# Altium PCB ATMega64_Breakout.PcbDoc
Units mil, origin at the board's own origin, x right, y up, seen from the top; angles counter-clockwise.
Board outline 2210 x 2080 mil, 2 copper layers (Top Layer, Bottom Layer); 18 components, 62 nets, 197 pads, 0 vias.
Unrouted connection lines stored in the file: 42.
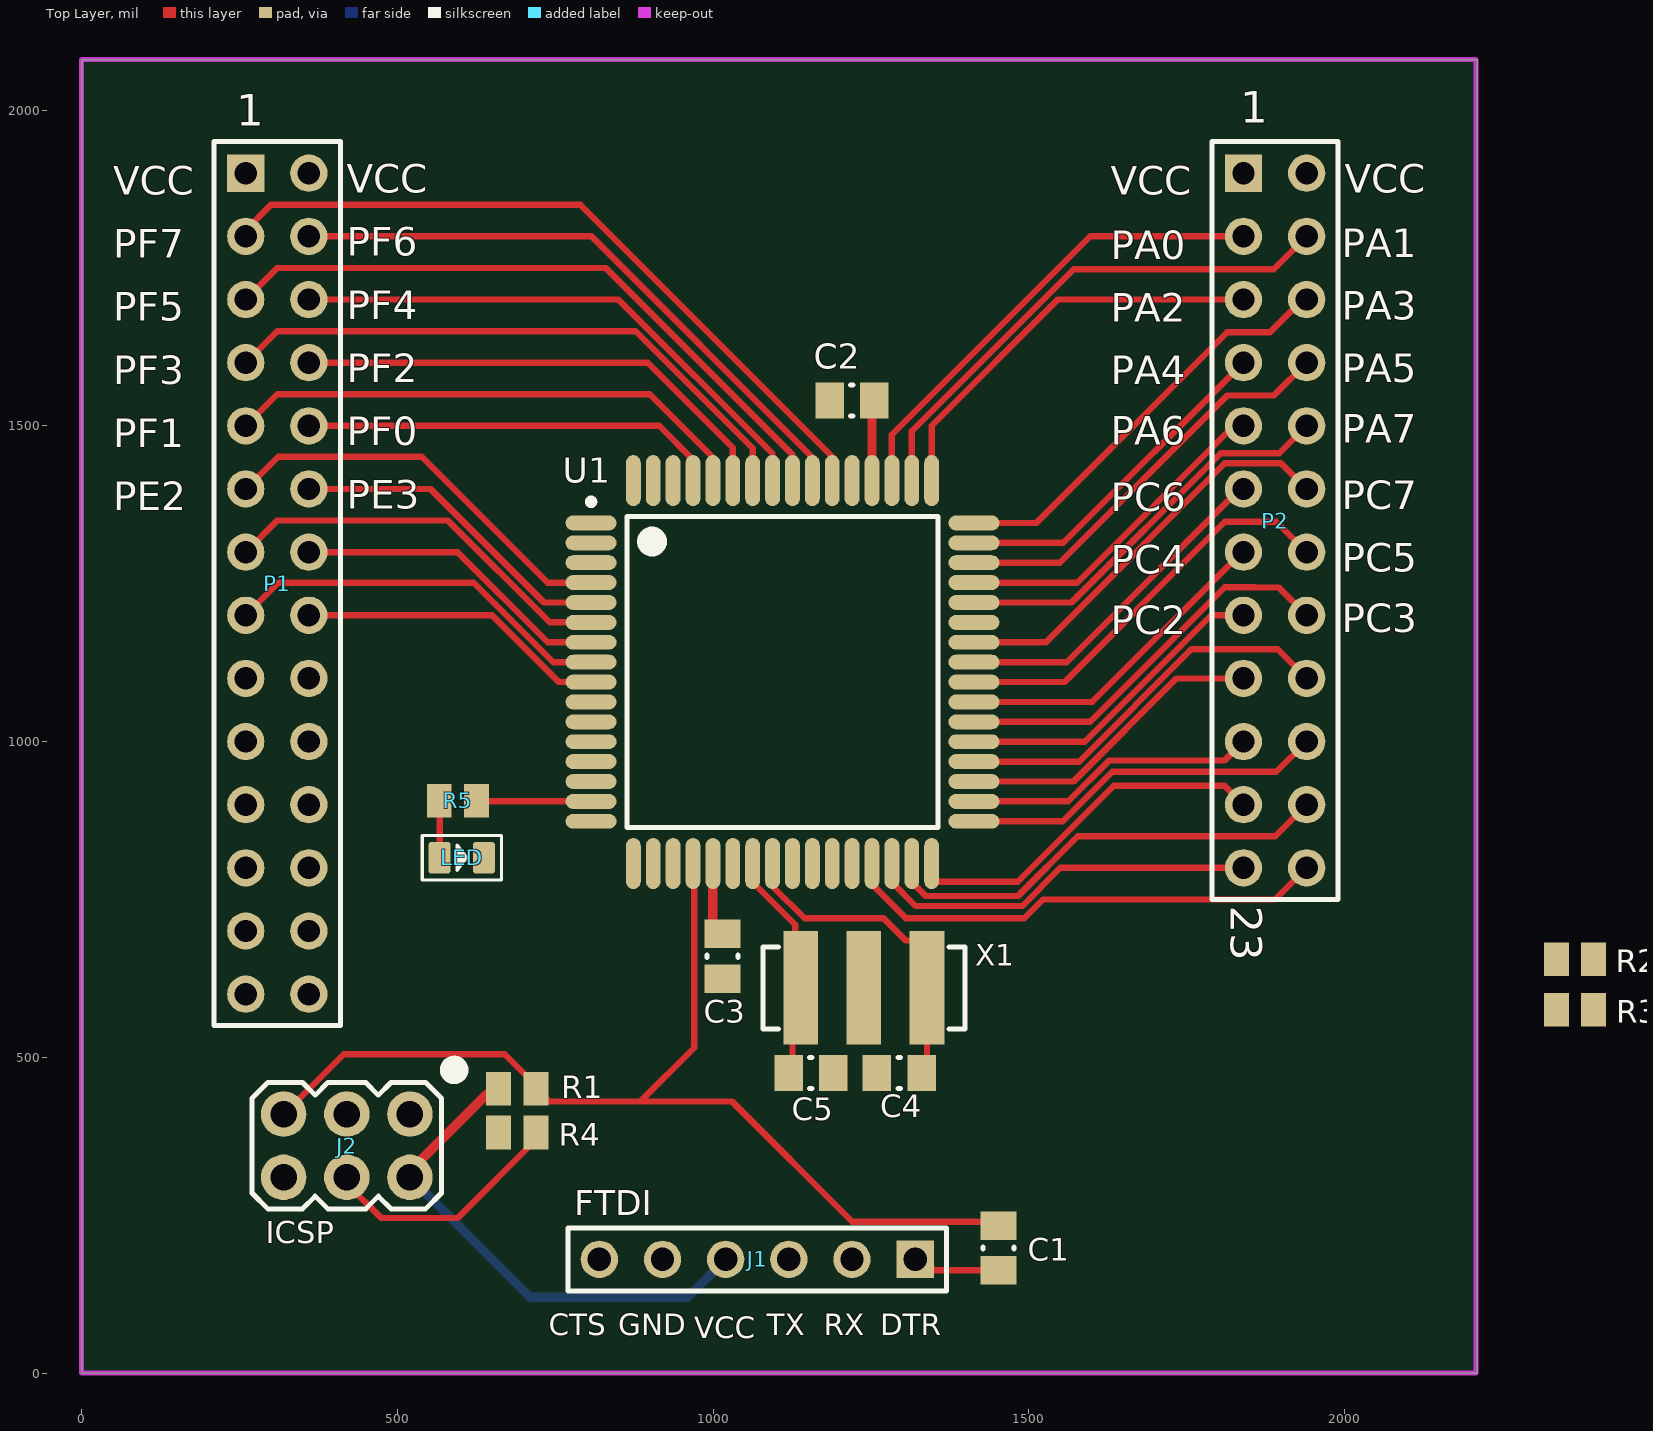
[diagram p0: Top Layer view]
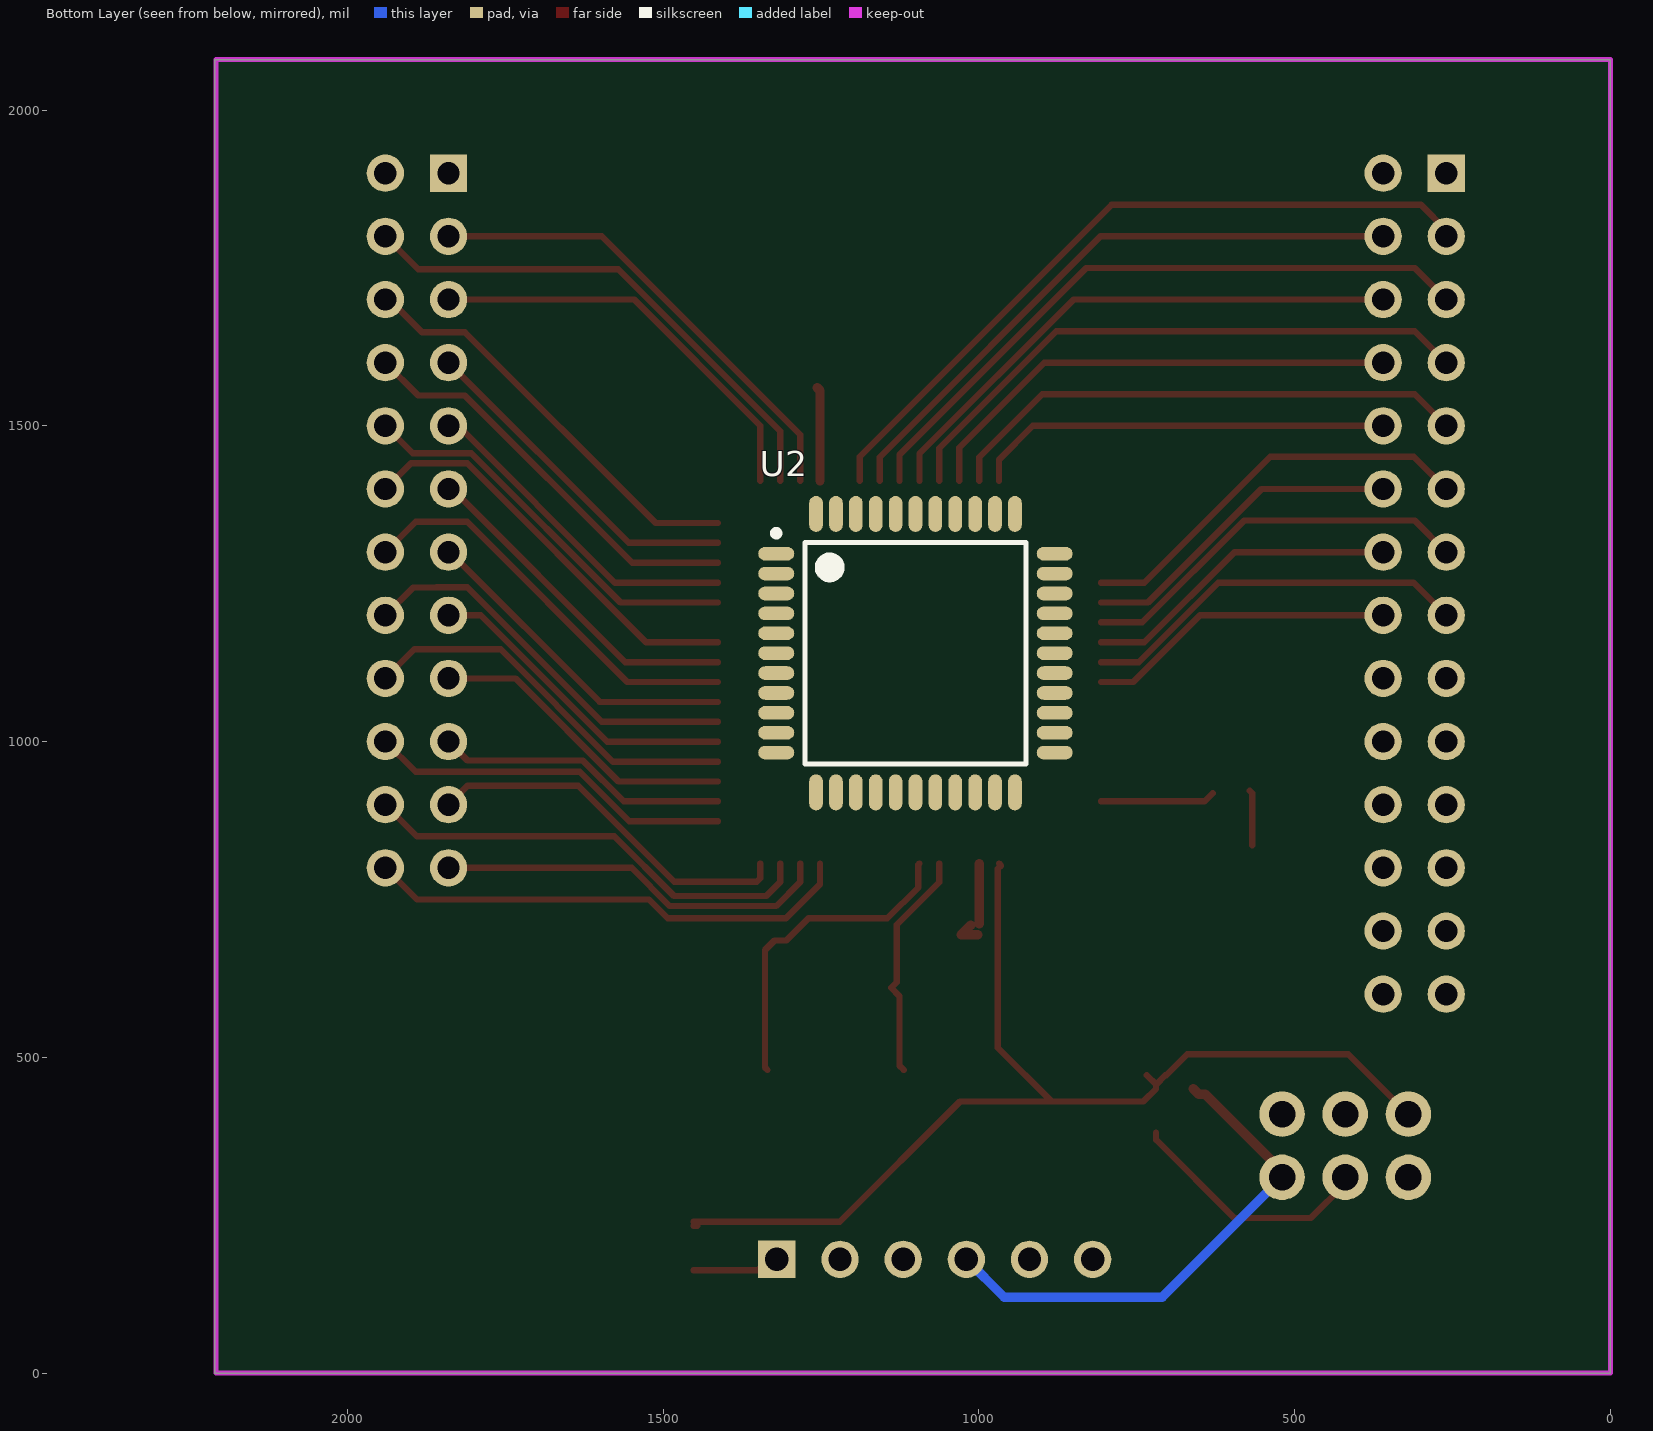
[diagram p1: Bottom Layer view, seen from below]

## Layer stack, top to bottom
Top Solder: solder mask 0.4, Solder Resist, Dk 3.5
Top Layer: signal copper 1.4
Dielectric 1: dielectric 12.6, FR-4, Dk 4.8
Bottom Layer: signal copper 1.4
Bottom Solder: solder mask 0.4, Solder Resist, Dk 3.5

## Board outline
0,0 2210,0 2210,2080 0,2080

## Design rules (kind name [scope] priority, off if disabled: settings)
Clearance [All] p1: gap=6 ignorepadtopadclearanceinfootprint=FALSE
PolygonConnect [All] p1: connectstyle=Relief reliefconductorwidth=10 reliefentries=4 polygonreliefangle="90 Angle" airgapwidth=10
RoutingVias [All] p1: holewidth=28 width=50 viastyle="Through Hole" minholewidth=28 minwidth=50 maxholewidth=28 maxwidth=50
SolderMaskExpansion [All] p1: expansion=4
Width [All] p1: maxlimit=300 minlimit=7 preferedwidth=10
30 further rules are at their usual default settings.

## Components (designator, comment, footprint, x,y, rotation, side; value= is the part's Value field where it differs from the comment)
C1 "100n" CAPC0805(2012)75_N 1452,198 r90 top
C2 "100n" CAPC0805(2012)75_N 1220,1540 r0 top
C3 "100n" CAPC0805(2012)75_N 1015,660 r90 top
C4 "22pF" CAPC0805(2012)75_N 1295,475 r0 top
C5 "22pF" CAPC0805(2012)75_N 1155,475 r180 top
J1 "FTDI" HDR1X6 1320,180 r180 top
J2 "ICSP" ICSP 520,410 r0 top locked
LED "LED" LED-0805 602,816 r0 top (schematic designator LED1)
P1 "Header 14X2" HDR2X14 260,1900 r270 top
P2 "Header 12X2" HDR2X12 1840,1900 r270 top
R1 "10k" RCHIP0805 690,450 r0 top
R2 "10k" RCHIP0805 2365,655 r180 top
R3 "10k" RCHIP0805 2365,575 r180 top
R4 "1K" RCHIP0805 690,380.87 r0 top
R5 "330" RCHIP0805 596,906 r0 top
U1 "ATmega64L-8AU" 64A_M 1110,1110 r0 top
U2 "ATmega1284P-AU" 44A_L 1100.5,1140 r180 bottom
X1 "XTAL" CRES_SMT 1338.77,610 r270 top

## Footprints (in the part's own frame and the unit in brackets; to place one, negate y for a bottom-side part, rotate by r counter-clockwise, add the part's x,y. Pads: shape width x height; smd on the part's side, far side on the other; paste and mask are expansions set on the pad)
44A_L [mm] "Thin QFP, 44-Leads, Body 10x10mm, Pitch 0.8mm, IPC High Density"
  oval 1.45x0.55 smd: 1(-5.6,4) 2(-5.6,3.2) 3(-5.6,2.4) 4(-5.6,1.6) 5(-5.6,0.8) 6(-5.6,0) 7(-5.6,-0.8) 8(-5.6,-1.6) 9(-5.6,-2.4) 10(-5.6,-3.2) 11(-5.6,-4) 23(5.6,-4) 24(5.6,-3.2) 25(5.6,-2.4) 26(5.6,-1.6) 27(5.6,-0.8) 28(5.6,0) 29(5.6,0.8) 30(5.6,1.6) 31(5.6,2.4) 32(5.6,3.2) 33(5.6,4)
  oval 0.55x1.45 smd: 12(-4,-5.6) 13(-3.2,-5.6) 14(-2.4,-5.6) 15(-1.6,-5.6) 16(-0.8,-5.6) 17(0,-5.6) 18(0.8,-5.6) 19(1.6,-5.6) 20(2.4,-5.6) 21(3.2,-5.6) 22(4,-5.6) 34(4,5.6) 35(3.2,5.6) 36(2.4,5.6) 37(1.6,5.6) 38(0.8,5.6) 39(0,5.6) 40(-0.8,5.6) 41(-1.6,5.6) 42(-2.4,5.6) 43(-3.2,5.6) 44(-4,5.6)
  silkscreen extent -5.72,-4.45 4.45,4.95, body extent -5,-5 5,5, height 1.2
64A_M [mm] "Thin QFP, 64-Leads, Body 14x14mm, Pitch 0.8mm, IPC Low Density"
  oval 2.05x0.6 smd: 1(-7.7,6) 2(-7.7,5.2) 3(-7.7,4.4) 4(-7.7,3.6) 5(-7.7,2.8) 6(-7.7,2) 7(-7.7,1.2) 8(-7.7,0.4) 9(-7.7,-0.4) 10(-7.7,-1.2) 11(-7.7,-2) 12(-7.7,-2.8) 13(-7.7,-3.6) 14(-7.7,-4.4) 15(-7.7,-5.2) 16(-7.7,-6) 33(7.7,-6) 34(7.7,-5.2) 35(7.7,-4.4) 36(7.7,-3.6) 37(7.7,-2.8) 38(7.7,-2) 39(7.7,-1.2) 40(7.7,-0.4) 41(7.7,0.4) 42(7.7,1.2) 43(7.7,2) 44(7.7,2.8) 45(7.7,3.6) 46(7.7,4.4) 47(7.7,5.2) 48(7.7,6)
  oval 0.6x2.05 smd: 17(-6,-7.7) 18(-5.2,-7.7) 19(-4.4,-7.7) 20(-3.6,-7.7) 21(-2.8,-7.7) 22(-2,-7.7) 23(-1.2,-7.7) 24(-0.4,-7.7) 25(0.4,-7.7) 26(1.2,-7.7) 27(2,-7.7) 28(2.8,-7.7) 29(3.6,-7.7) 30(4.4,-7.7) 31(5.2,-7.7) 32(6,-7.7) 49(6,7.7) 50(5.2,7.7) 51(4.4,7.7) 52(3.6,7.7) 53(2.8,7.7) 54(2,7.7) 55(1.2,7.7) 56(0.4,7.7) 57(-0.4,7.7) 58(-1.2,7.7) 59(-2,7.7) 60(-2.8,7.7) 61(-3.6,7.7) 62(-4.4,7.7) 63(-5.2,7.7) 64(-6,7.7)
  silkscreen extent -7.82,-6.25 6.25,6.97, body extent -7,-7 7,7, height 1.2
CAPC0805(2012)75_N [mm] "Chip Capacitor, Body 2.0x1.2mm, Height 0.75mm, IPC Medium Density"
  rect 1.15x1.45 smd: 1(-0.9,0) 2(0.9,0)
  silkscreen extent -0.05,-0.62 0.05,0.63, body extent -1.51,-0.72 1.49,0.73, height 0.75
CRES_SMT [mil]
  rect 180x55 smd: 1(0,0) 2(0,-100) 3(0,-200)
  silkscreen extent -65,-260 65,60
HDR1X6 [mm] "Connector; Header; 6 Position"
  rect 1.5x1.5 hole 0.94: 1(0,0)
  round 1.5 hole 0.94: 2(2.54,0) 3(5.08,0) 4(7.62,0) 5(10.16,0) 6(12.7,0)
  silkscreen extent -1.27,-1.27 13.97,1.27
HDR2X12 [mm] "Connector; Header; 12x2 Position"
  rect 1.5x1.5 hole 0.9: 1(0,0)
  round 1.5 hole 0.9: 2(0,2.54) 3(2.54,0) 4(2.54,2.54) 5(5.08,0) 6(5.08,2.54) 7(7.62,0) 8(7.62,2.54) 9(10.16,0) 10(10.16,2.54) 11(12.7,0) 12(12.7,2.54) 13(15.24,0) 14(15.24,2.54) 15(17.78,0) 16(17.78,2.54) 17(20.32,0) 18(20.32,2.54) 19(22.86,0) 20(22.86,2.54) 21(25.4,0) 22(25.4,2.54) 23(27.94,0) 24(27.94,2.54)
  silkscreen extent -1.27,-1.27 29.21,3.81
HDR2X14 [mm] "Connector; Header; 14x2 Position"
  rect 1.5x1.5 hole 0.9: 1(0,0)
  round 1.5 hole 0.9: 2(0,2.54) 3(2.54,0) 4(2.54,2.54) 5(5.08,0) 6(5.08,2.54) 7(7.62,0) 8(7.62,2.54) 9(10.16,0) 10(10.16,2.54) 11(12.7,0) 12(12.7,2.54) 13(15.24,0) 14(15.24,2.54) 15(17.78,0) 16(17.78,2.54) 17(20.32,0) 18(20.32,2.54) 19(22.86,0) 20(22.86,2.54) 21(25.4,0) 22(25.4,2.54) 23(27.94,0) 24(27.94,2.54) 25(30.48,0) 26(30.48,2.54) 27(33.02,0) 28(33.02,2.54)
  silkscreen extent -1.27,-1.27 34.29,3.81
ICSP [mil]
  round 72 hole 42: 1(0,0) 2(0,-100) 3(-100,0) 4(-100,-100) 5(-200,0) 6(-200,-100)
  silkscreen extent -250,-150 80,80
LED-0805 [mil]
  rrect25% 35x50 smd: +(-35,0) -(35,0)
  silkscreen extent -62,-35 63,35
RCHIP0805 [mm] "Chip Resistor, 2-Leads, Body 2.00x1.25mm, IPC High Density"
  rect 1x1.35 smd: 1(-0.75,0) 2(0.75,0)
  body extent -1.1,-0.72 1.1,0.72, height 0.6

## Part data
C1 C2 C3 C4 C5: library part U0805F104ZCT, TOLERANCE=-20/+80%, VOLTAGERATING=50V, MPN=U0805F104ZCT, OC_FARNELL=9406409, OC_NEWARK=38K9281, SUPPLIER=Multicomp
J1: library part ICSP, "In-Circuit Serial Programming Header"
J2: "AVR ICSP"
LED: library part SMD-LED-CLEAR-RED(0805), MPN=17-215SURC/S530-A2/TR8
P1: "Header, 14-Pin, Dual row", LatestRevisionDate=17-Jul-2002, LatestRevisionNote="Re-released for DXP Platform.", Publisher="Altium Limited"
P2: "Header, 12-Pin, Dual row", LatestRevisionDate=17-Jul-2002, LatestRevisionNote="Re-released for DXP Platform.", Publisher="Altium Limited"
R1 R2 R3: library part MC0.1W08051%10K, TOLERANCE=±1%, MPN=MC0.1W08051%10K, OC_FARNELL=9332391, OC_NEWARK=-, SUPPLIER=Multicomp, WATTAGE="1/10 W"
R4 R5: library part MC0.1W08051%1K, TOLERANCE=±1%, MPN=MC0.1W08051%1K, OC_FARNELL=9332383, OC_NEWARK=-, SUPPLIER=Multicomp, WATTAGE="1/10 W"
U1: "8-bit AVR Microcontroller, 2.7-5.5V, 64KB Flash, 2KB EEPROM, 4KB SRAM, 64-pin TQFP, Industrial Grade (-40°C to 85°C), Pb-Free", Code_JEDEC=MS-026-AEB, ComponentLink1Description="Manufacturer URL", ComponentLink1URL=http://www.atmel.com/, ComponentLink2Description="ATmega64(L)  Datasheet", ComponentLink2URL=http://www.atmel.com/dyn/resources/prod_documents/doc2490.pdf, ComponentLink3Description="ATmega64(L) Summary", ComponentLink3URL=http://www.atmel.com/dyn/resources/prod_documents/2490S.pdf, DatasheetVersion="revQ, Jul-2010", PackageDescription="64-Pin Plastic Thin Profile Quad Flat Pack, 14 x 14 x 1.0 mm Body, 0.8 mm Pitch (TQFP)", PackageReference=64A, PackageVersion="revC, Oct-2010"
U2: "8-bit AVR Microcontroller, 128KB Flash, 4KB EEPROM, 16KB SRAM, 44-pin TQFP, Industrial Grade (-40°C to 85°C)", Code_JEDEC=MS-026-ACB, ComponentLink1Description="Manufacturer URL", ComponentLink1URL=http://www.atmel.com/, ComponentLink2Description="ATmega164A/164PA/324A/324PA/644A/644PA/1284/1284P Datasheet", ComponentLink2URL=http://www.atmel.com/dyn/resources/prod_documents/doc8272.pdf, ComponentLink3Description="ATmega164A/164PA/324A/324PA/644A/644PA/1284/1284P Summary", ComponentLink3URL=http://www.atmel.com/dyn/resources/prod_documents/8272S.pdf, DatasheetVersion="revC, Jun-2011", PackageDescription="44-Pin Plastic Thin Profile Quad Flat Pack, 10 x 10 x 1.0 mm Body, 0.8 mm Pitch (TQFP)", PackageReference=44A, PackageVersion="revC, Oct-2010"
X1: "Crystal Oscillator", LatestRevisionDate=17-Jul-2002, LatestRevisionNote="Re-released for DXP Platform.", PackageDescription="Crystal, Thru-Hole; 2 Leads; Body 3.1 x 8.2 mm (Dia.xH)", PackageReference=R38, Published=8-Jun-2000, Publisher="Altium Limited"

## Nets (pads, with @x,y where several pads share a name; then routed paths per layer and width w, separated by ;. In a path a pad name is that pad's centre, name@x,y a point inside that pad or via, vN(x,y) a via of type N, cw(c..) or ccw(c..) an arc to the next point about the centre after c; other vN are vias at no path point)
\P\E\N: U1.1
GND: C2.1 C3.1 C4.1 C5.1 J1.5 J1.6 J2.6 LED.- P1.27 P1.28 U1.22 U1.53 U1.63 U2.6 U2.18 U2.28 U2.39 X1.2
NetC1_1: C1.1 J1.1 | length 139.2
  Top Layer w10: J1.1 1332.95,180 1350.39,162.57 C1.1
NetC4_2: C4.2 U1.24 X1.1 | length 513.9
  Top Layer w10: U1.24 1096.25,804.86 1096.25,768.75 1145,720 1270,720 1305,685 1323.74,685 1338.77,669.97 X1.1 1338.77,483.77 C4.2@1335,480
NetC5_2: C5.2 U1.23 X1.3 | length 366.5
  Top Layer w10: U1.23 1062.76,777.24 1130,710 1130,618.77 X1.3 1125.75,596.98 1125.75,486.61 C5.2@1119.13,480
NetJ2_4: J2.4 R4.2 | length 394.9
  Top Layer w10: J2.4 420,300 474.57,245.43 595.43,245.43 719.53,369.53 R4.2
NetLED1_+: LED.+ R5.1 | length 83.6
  Top Layer w10: LED.+@567,836 R5.1@567,914.06 ; R5.1@567,918.06 R5.1@570.94,922
PA0: P2.3 U1.51 | length 759.6
  Top Layer w10: U1.51 1283.23,1485.86 1597.37,1800 P2.3
PA1: P2.4 U1.50 | length 831.3
  Top Layer w10: U1.50 1314.72,1491.35 1571.37,1748 1888,1748 P2.4
PA2: P2.5 U1.49 | length 663.6
  Top Layer w10: U1.49 1346.22,1500.22 1546,1700 P2.5
PA3: P2.6 U1.48 | length 673.4
  Top Layer w10: U1.48 1512.22,1346.22 1814,1648 1882,1648 1934,1700 P2.6
PA4: P2.7 U1.47 | length 545
  Top Layer w10: U1.47 1554.72,1314.72 P2.7
PA5: P2.8 U1.46 | length 658.1
  Top Layer w10: U1.46 1549.23,1283.23 1814,1548 1888,1548 P2.8
PA6: P2.9 U1.45 | length 529.7
  Top Layer w10: U1.45 1576.48,1251.73 1824.75,1500 P2.9
PA7: P2.10 U1.44 | length 642.7
  Top Layer w10: U1.44 1567.61,1220.24 1803.9,1456.53 1896.53,1456.53 P2.10
PB0: U1.10
PB2: U1.12
PB3: U1.13
PB4: U1.14
PB5: R5.2 U1.15 | length 182.1
  Top Layer w10: R5.2@630,918 642.72,905.28 U1.15
PB6: U1.16
PB7: U1.17
PC0: P2.17 U1.35 | length 494.5
  Top Layer w10: U1.35 1570.77,936.77 1734,1100 P2.17
PC1: P2.18 U1.36 | length 619.5
  Top Layer w10: U1.36 1579.64,968.27 1757.37,1146 1894,1146 P2.18
PC2: P2.15 U1.37 | length 509.8
  Top Layer w10: U1.37 1588.51,999.76 1788.75,1200 P2.15
PC3: P2.16 U1.38 | length 633.6
  Top Layer w10: U1.38 1597.26,1031.26 1810.53,1244.53 1858.44,1244.53 1858.97,1244 1896,1244 P2.16
PC4: P2.13 U1.39 | length 525.1
  Top Layer w10: U1.39 1600.47,1062.76 1837.72,1300 P2.13
PC5: P2.14 U1.40 | length 651.8
  Top Layer w10: U1.40 1556.78,1094.25 1810.53,1348 1892,1348 P2.14
PC6: P2.11 U1.41 | length 540.4
  Top Layer w10: U1.41 1559.99,1125.75 1834.24,1400 P2.11
PC7: P2.12 U1.42 | length 661
  Top Layer w10: U1.42 1527.24,1157.24 1810.53,1440.53 1899.47,1440.53 P2.12
PD4: P2.24 U1.29 | length 776.8
  Top Layer w10: U1.29 1251.73,773.76 1305.5,720 1492.72,720 1522.72,750 1890,750 P2.24
PD5: P2.23 U1.30 | length 626.9
  Top Layer w10: U1.30 1283.23,777.54 1321.28,739.5 1489.5,739.5 1550,800 P2.23
PD6: P2.22 U1.31 | length 723.6
  Top Layer w10: U1.31 1314.72,777.54 1336.77,755.5 1482.87,755.5 1577.37,850 1890,850 P2.22
PD7: P2.21 U1.32 | length 594.6
  Top Layer w10: U1.32 1346.22,783.78 1352,778 1482.72,778 1634.72,930 1810,930 P2.21
PE2: P1.11 U1.4 | length 650.7
  Top Layer w10: P1.11 311.26,1451.26 538.74,1451.26 738.27,1251.73 U1.4
PE3: P1.12 U1.5 | length 521.3
  Top Layer w10: P1.12 552.63,1400 732.39,1220.24 U1.5
PE4: P1.13 U1.6 | length 634.4
  Top Layer w10: P1.13 310,1350 580,1350 741.26,1188.74 U1.6
PE5: P1.14 U1.7 | length 506
  Top Layer w10: P1.14 595.25,1300 738.01,1157.24 U1.7
PE6: P1.15 U1.8 | length 620.5
  Top Layer w10: P1.15 311.73,1251.73 620.9,1251.73 746.88,1125.75 U1.8
PE7: P1.16 U1.9 | length 490.7
  Top Layer w10: P1.16 650,1200 755.75,1094.25 U1.9
PF0: P1.10 U1.61 | length 663.7
  Top Layer w10: P1.10 914.62,1500 968.27,1446.35 U1.61
PF1: P1.9 U1.60 | length 838.9
  Top Layer w10: P1.9 310,1550 900,1550 999.76,1450.24 U1.60
PF2: P1.8 U1.59 | length 756.8
  Top Layer w10: P1.8@382.5,1600 896.73,1600 1031.26,1465.47 U1.59
PF3: P1.7 U1.58 | length 985
  Top Layer w10: P1.7 310,1650 877.37,1650 1062.76,1464.62 U1.58 ; 340,1600 349.39,1609.39 369.39,1609.39
PF4: P1.6 U1.57 | length 878
  Top Layer w10: P1.6 850,1700 1094.25,1455.75 U1.57
PF5: P1.5 U1.56 | length 1050.1
  Top Layer w10: P1.5 310,1750 830,1750 1125.75,1454.25 U1.56
PF6: P1.4 U1.55 | length 979.2
  Top Layer w10: P1.4 807.53,1800 1157.24,1450.28 U1.55
PF7: P1.3 U1.54 | length 1158.6
  Top Layer w10: P1.3 260,1810 300,1850 790,1850 1188.74,1451.26 U1.54
PG0: P2.20 U1.33 | length 579.1
  Top Layer w10: U1.33 1553.78,873.78 1632,952 1892,952 P2.20
PG1: P2.19 U1.34 | length 466.1
  Top Layer w10: U1.34 1562.65,905.28 1627.37,970 1810,970 P2.19
PG2: U1.43
PG3: U1.18
PG4: U1.19
RST: C1.2 J2.5 R1.2 U1.20 U2.4 | length 1735.9
  Top Layer w10: J2.5 415,505 670,505 703.43,471.57 704.84,471.57 R1.2@719.53,456.89 ; R1.2@734.21,471.57 R1.2@719.53,456.89 ; 885,430 970,515 970,798.58 965,803.58 U1.20 ; C1.2 1446.09,233.43 1452,239.34 1220.66,239.34 1030,430 739.53,430 R1.2 R1.2@719.53,456.89
RXD0: J1.2 R4.1 U1.3
RXD1: U1.27
SCK: J2.3 U1.11 U2.3
SCL: R3.2 U1.25
SDA: R2.2 U1.26
TXD0: J1.3 J2.1 U1.2
TXD1: U1.28
VCC: C2.2 C3.2 J1.4 J2.2 P1.1 P1.2 P2.1 P2.2 R1.1 R2.1 R3.1 U1.21 U1.52 U1.64 U2.5 U2.17 U2.27 U2.38 | length 1099.6
  Top Layer w15: J2.2 523.87,313.87 523.87,323.87 641.82,441.82 652.29,441.82 R1.1 ; C3.2@999.76,711.14 U1.21 ; C3.2@1002.14,694.3 1016.77,694.3 1016.83,694.24 C3.2@1028.14,694.24 ; C3.2@1013,709.43 C3.2@1028.14,694.3 ; U1.52 1251.73,1555.87 C2.2@1255.87,1560
  Bottom Layer w15: J2.2 710,120 960,120 J1.4
pads on no net: P1.17 P1.18 P1.19 P1.20 P1.21 P1.22 P1.23 P1.24 P1.25 P1.26 U1.62 U2.1 U2.2 U2.7 U2.8 U2.9 U2.10 U2.11 U2.12 U2.13 U2.14 U2.15 U2.16 U2.19 U2.20 U2.21 U2.22 U2.23 U2.24 U2.25 U2.26 U2.29 U2.30 U2.31 U2.32 U2.33 U2.34 U2.35 U2.36 U2.37 U2.40 U2.41 U2.42 U2.43 U2.44

## Keep-outs
Keep-Out Layer:
  lines w8: 0,0 0,2080 2208,2080 2208,0 0,0

## Silkscreen, mask and mechanical layers (free items; w line width, h text height)
Top Overlay:
  text "VCC" at 420,1869 h45
  text "VCC" at 2000,1869 h45
  text "VCC" at 50,1866 h45
  text "VCC" at 1630,1866 h45
  text "PF6" at 420,1769 h45
  text "PA1" at 1996,1767 h45
  text "PF7" at 50,1766 h45
  text "PA0" at 1630,1764 h45
  text "PF4" at 420,1669 h45
  text "PA3" at 1996,1668 h45
  text "PF5" at 50,1666 h45
  text "PA2" at 1630,1665 h45
  text "PF2" at 420,1569 h45
  text "PA5" at 1996,1569 h45
  text "PF3" at 50,1566 h45
  text "PA4" at 1630,1566 h45
  text "PA7" at 1996,1473 h45
  text "PA6" at 1630,1470 h45
  text "PF0" at 420,1469 h45
  text "PF1" at 50,1466 h45
  text "PE3" at 420,1369 h45
  text "PC7" at 1996,1368 h45
  text "PE2" at 50,1366 h45
  text "PC6" at 1630,1365 h45
  text "PC5" at 1996,1269 h45
  text "PC4" at 1630,1266 h45
  text "PC3" at 1996,1173 h45
  text "PC2" at 1630,1170 h45
  text "CTS" at 740,60 h34
  text "GND" at 850,60 h34
  text "TX" at 1085,60 h34
  text "RX" at 1175,60 h34
  text "DTR" at 1265,60 h34
  text "VCC" at 970,55 h34
Drill Drawing:
  lines w8: 0,0 2214,0 2214,2082 0,2082 0,0

## Text inside footprints (layer, text, board x,y; h text height)
P1: Top Overlay "1" at 245,1975 h50
P2: Top Overlay "1" at 1835,1980 h50; Top Overlay "23" at 1820,740 h50 r270